# Altium PCB PCB - ancienne.PcbDoc
Units mm, origin at the board's own origin, x right, y up, seen from the top; angles counter-clockwise.
Board outline 62.87 x 92.25 mm, 2 copper layers (Top Layer, Bottom Layer); 28 components, 24 nets, 132 pads, 17 vias.
Unrouted connection lines stored in the file: 1.
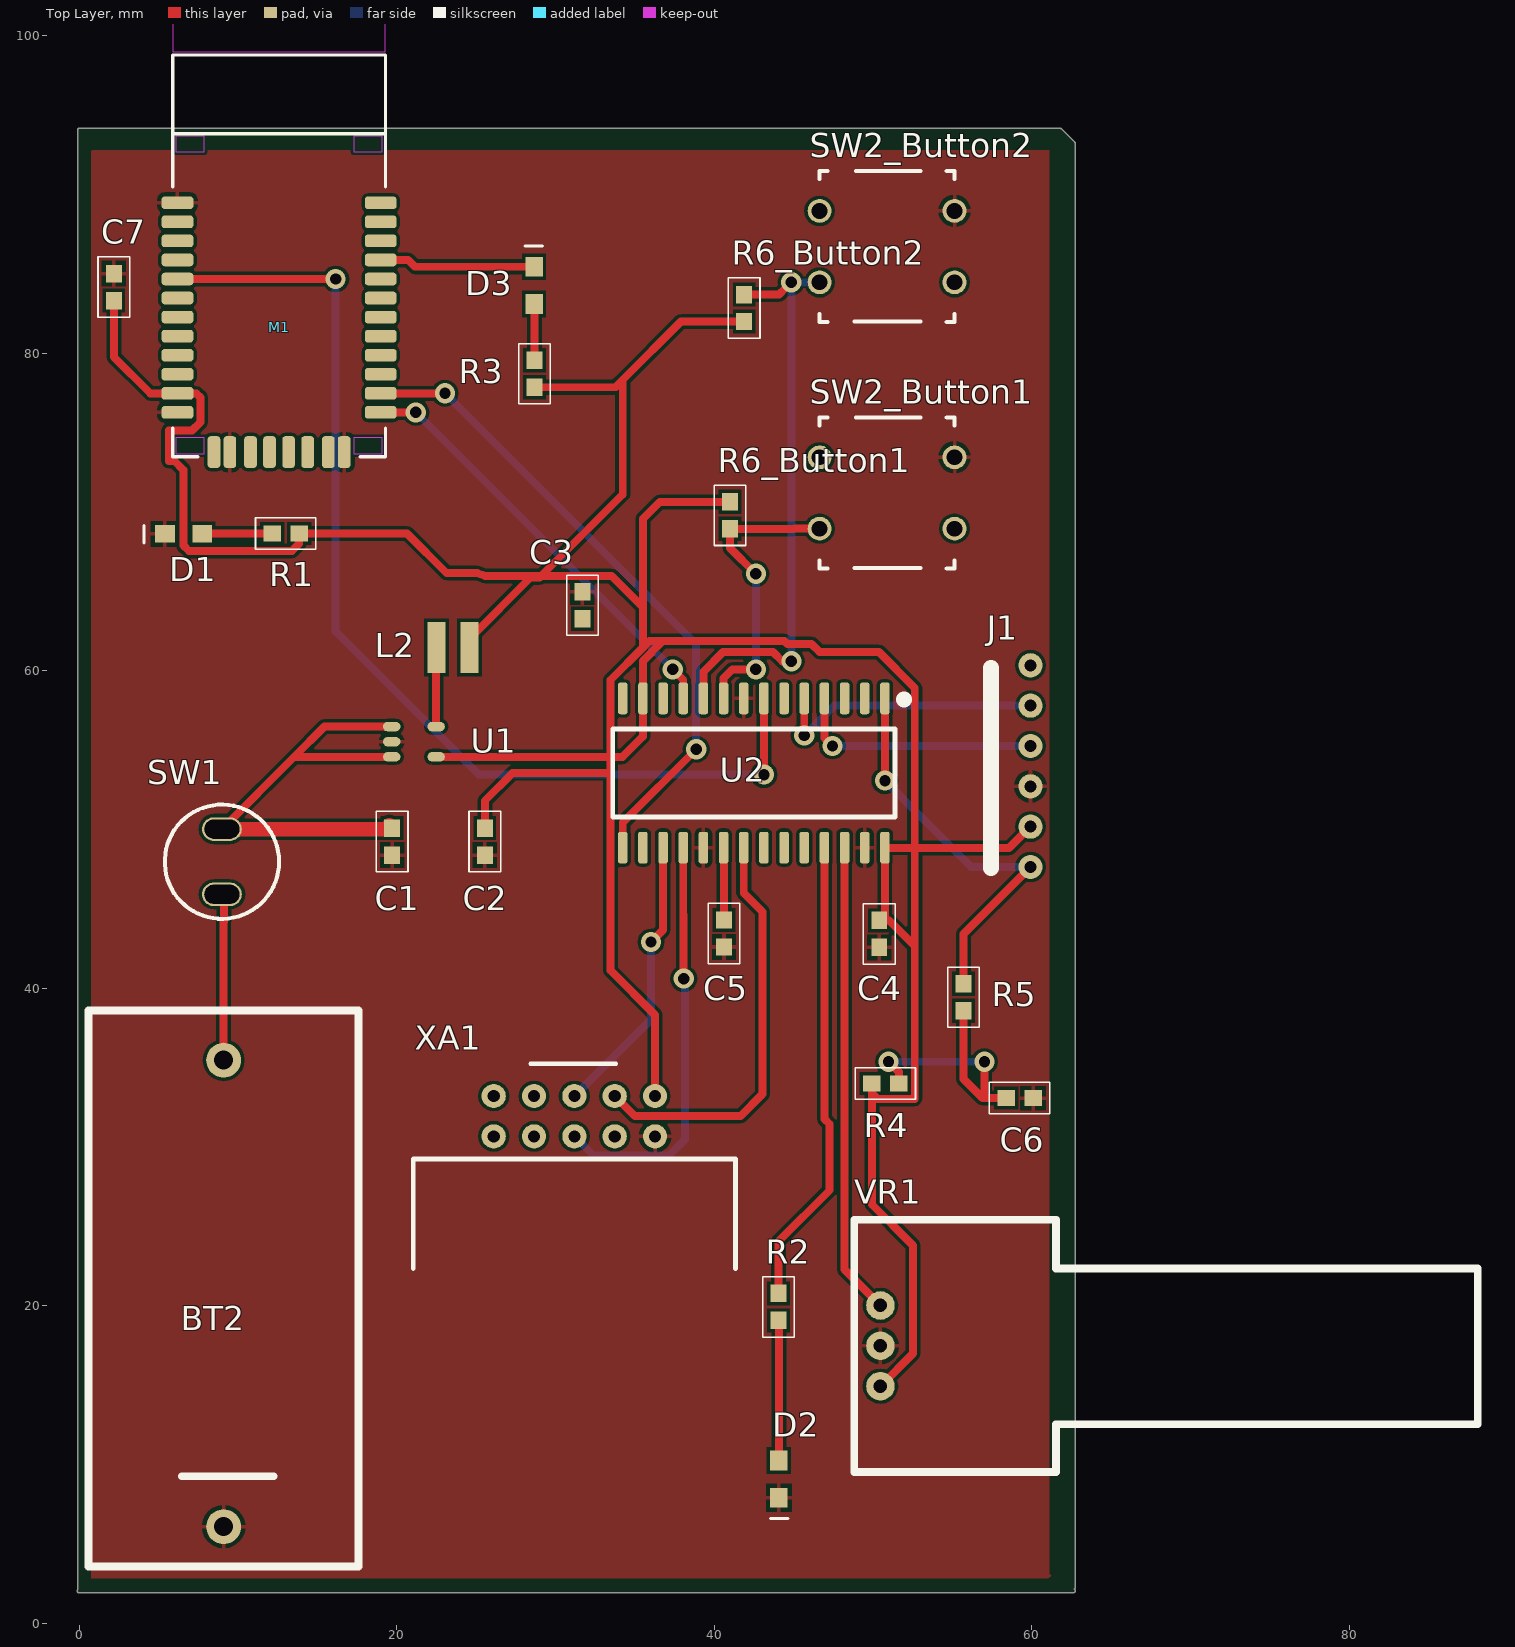
[diagram p0: Top Layer view]
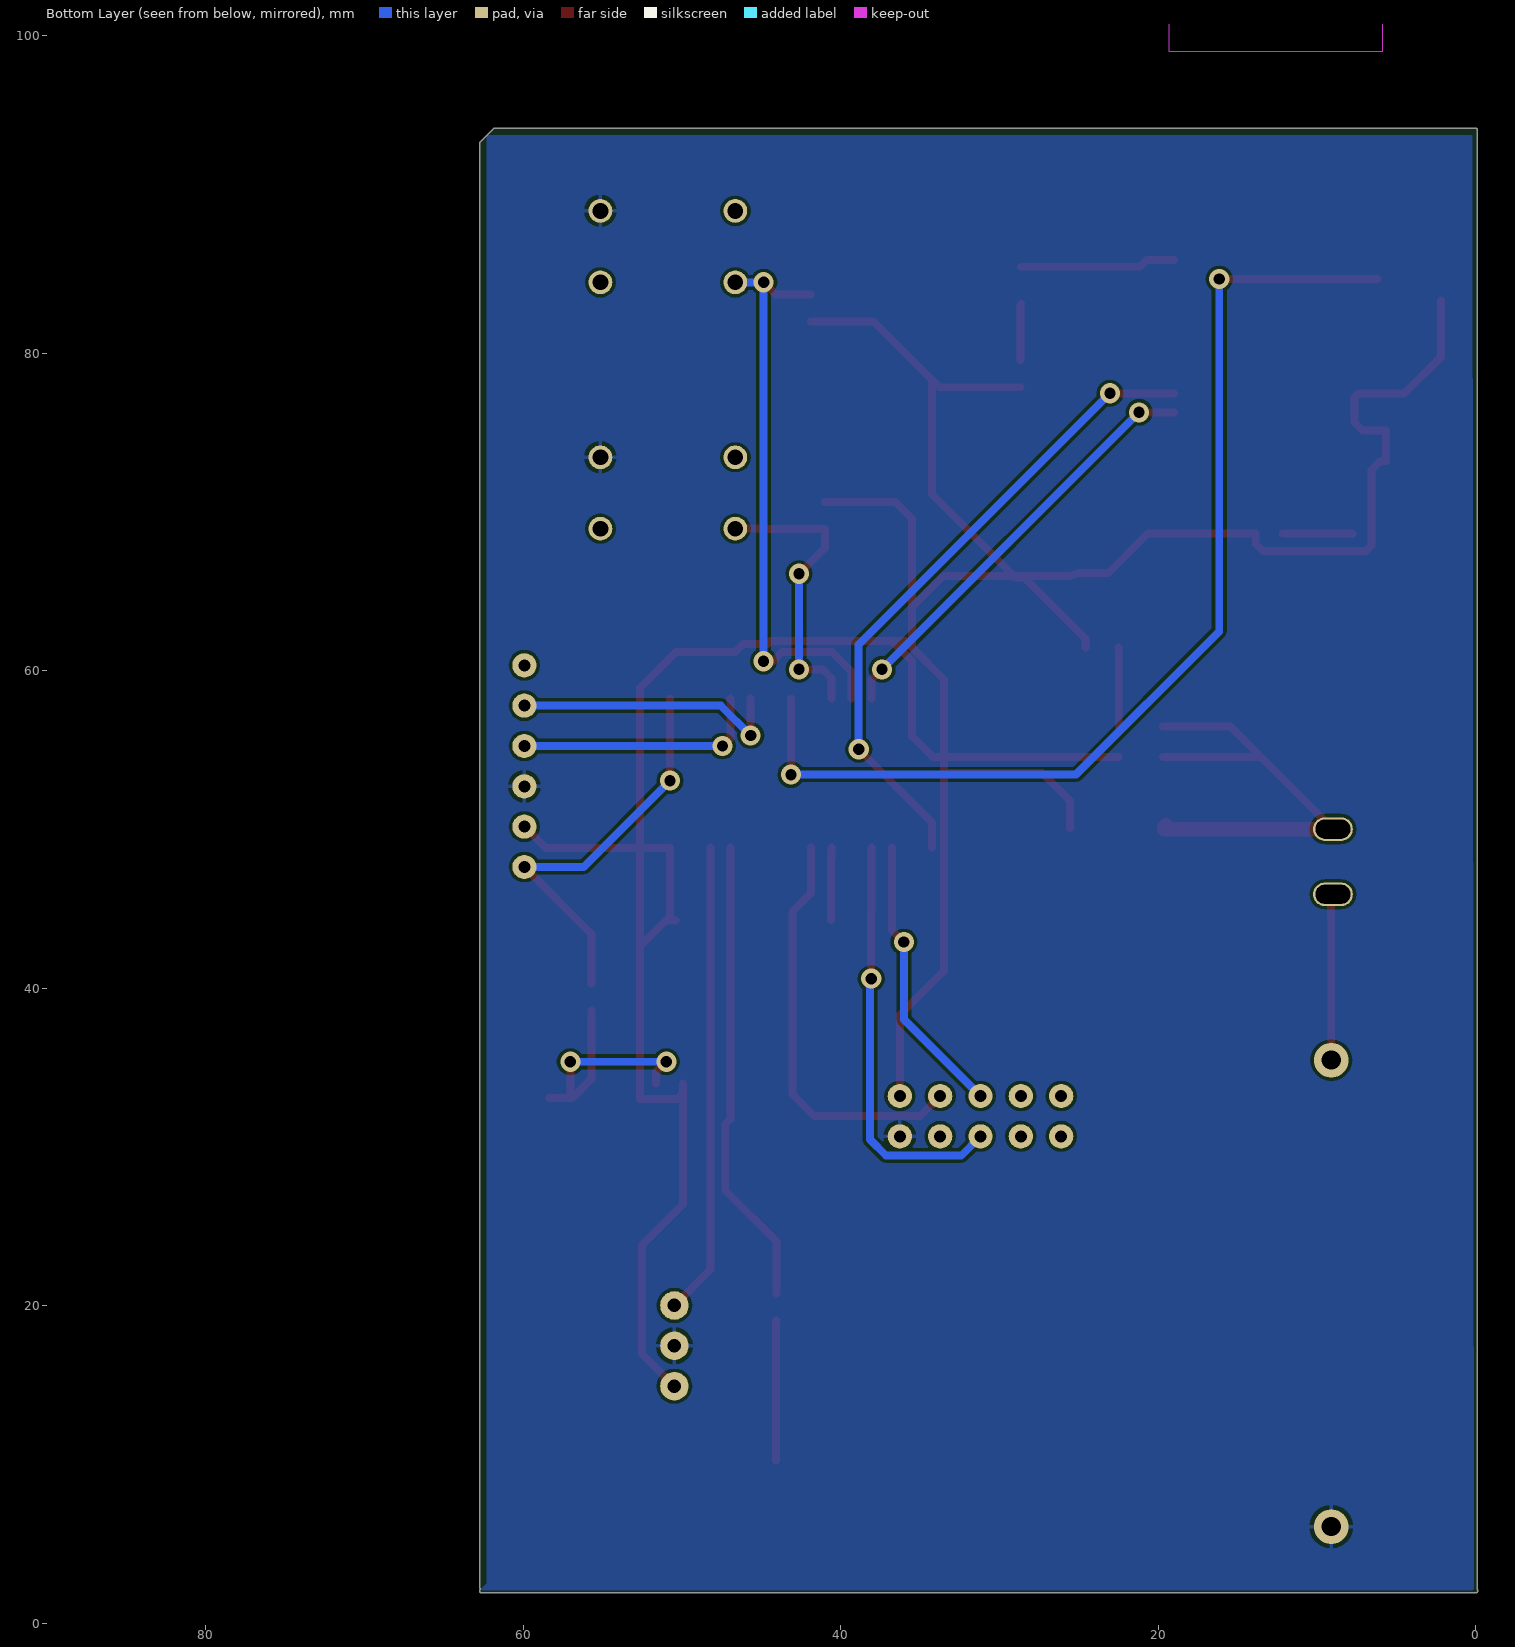
[diagram p1: Bottom Layer view, seen from below]

## Layer stack, top to bottom
Top Solder: solder mask 0.0102, Solder Resist, Dk 3.5
Top Layer: signal copper 0.0356
Dielectric 1: dielectric 0.32, FR-4, Dk 4.8
Bottom Layer: signal copper 0.0356
Bottom Solder: solder mask 0.0102, Solder Resist, Dk 3.5

## Board outline
-0.102,2.134 -0.102,94.056 cw(c0.025,94.056) 0.025,94.184 61.773,94.184 cw(c61.773,94.056) 61.863,94.146 62.701,93.308 62.701,93.309 cw(c62.611,93.218) 62.738,93.218 62.738,2.286 cw(c62.611,2.286) 62.667,2.172 cw(c62.611,2.057) 62.738,2.057 cw(c62.611,2.057) 62.611,1.93 0,1.93 cw(c0,2.057)

## Design rules (kind name [scope] priority, off if disabled: settings)
Clearance [All] p1: gap=0.2
HoleSize [All] p1: absolutevalues=TRUE maxlimit=2.54 minlimit=0.3 maxpercent=80.000 minpercent=20.000
PolygonConnect [All] p1: connectstyle=Relief reliefconductorwidth=0.254 reliefentries=4 polygonreliefangle="90 Angle" airgapwidth=0.254
RoutingVias [All] p1: holewidth=0.711 width=1.27 viastyle="Through Hole" minholewidth=0.3 minwidth=0.7 maxholewidth=0.711 maxwidth=1.27
SolderMaskExpansion [All] p1: expansion=0.102
UnpouredPolygon [All] p1: allowunpoured=FALSE
Width [All] p1: maxlimit=2 minlimit=0.3 preferedwidth=0.5
28 further rules are at their usual default settings.

## Classes and differential pairs
channel class Button: Button1 Button2
component class PIC32MX: C3 C4 C5 C6 D2 J1 R2 R4 R5 U2 VR1
component class Button2: R6_Button2 SW2_Button2
component class Button1: R6_Button1 SW2_Button1
component class Bluetooth: C7 D3 M1 R3
component class Alim: BT2 C1 C2 D1 L2 R1 SW1 U1
component class 9-axe: XA1

## Components (designator, comment, footprint, x,y, rotation, side; value= is the part's Value field where it differs from the comment)
BT2 "Battery" "Battery Holder" 9.1,6.1 r90 top
C1 "4.7 uF" "CAP 0603" 19.71,49.251 r90 top
C2 "10 uF" "CAP 0603" 25.552,49.251 r90 top
C3 "0.1uF" "CAP 0603" 31.699,64.135 r270 top
C4 "0.1uF" "CAP 0603" 50.394,43.434 r90 top
C5 "10uF" "CAP 0603" 40.615,43.459 r90 top
C6 "0.1uF" "CAP 0603" 59.233,33.096 r180 top
C7 "Cap" "CAP 0603" 2.184,84.176 r270 top
D1 "2mA, 1.8V" LED 6.579,68.631 r180 top
D2 "2mA, 1.8V" LED 44.069,9.093 r270 top
D3 "2mA, 1.8V" LED 28.651,84.277 r90 top
J1 "Program / Debug" ICSP 59.919,47.65 r90 top
L2 "4.7uH" Coil 23.546,61.468 r0 top
M1 "RN42" RN42 5.893,73.482 r0 top
R1 "750" "RES 0603" 13.005,68.656 r0 top
R2 "750" "RES 0603" 44.044,19.939 r90 top
R3 "750" "RES 0603" 28.677,78.715 r270 top
R4 "10K" "RES 0603" 50.775,34.011 r180 top
R5 "1K" "RES 0603" 55.702,39.446 r270 top
R6_Button1 "10k" "RES 0603" 40.996,69.799 r90 top (schematic designator R6)
R6_Button2 "10k" "RES 0603" 41.885,82.855 r270 top (schematic designator R6)
SW1 "SW" "Nouveau Bouton" 8.992,47.981 r90 top
SW2_Button1 "SW-SPST" SWITCH 46.634,66.954 r0 top (schematic designator SW2)
SW2_Button2 "SW-SPST" SWITCH 46.634,82.474 r0 top (schematic designator SW2)
U1 "MCP1503B" MCP1603B/TSOT 19.685,56.49 r0 top
U2 "PIC32MX150F128B" PIC32MX150F128B 50.749,58.268 r270 top
VR1 "5k" 91A1A-B28-B13L 48.819,9.55 r0 top
XA1 "MOD-MPU9150 Breakout Board" MOD-MPU9150 30.81,27.838 r270 top

## Footprints (in the part's own frame and the unit in brackets; to place one, negate y for a bottom-side part, rotate by r counter-clockwise, add the part's x,y. Pads: shape width x height; smd on the part's side, far side on the other; paste and mask are expansions set on the pad)
91A1A-B28-B13L [mm] "Potard"
  round 1.8 hole 0.85: 1(1.65,5.4) 2(1.65,7.94) 3(1.65,10.48)
  silkscreen extent 0,0 39.27,15.88
"Battery Holder" [mm]
  round 2.2 hole 1.2: 1(29.38,0) 2(0,0)
  silkscreen extent -2.5,-8.5 32.5,8.5
"CAP 0603" [mm]
  rect 1.1x1 smd: 1(-0.85,0) 2(0.85,0)
  silkscreen extent -1.9,-1 1.9,1
Coil [mm]
  rect 1.12x3.2 smd: 1(-1.04,0) 2(1.04,0)
ICSP [mil] "ICSP - 6 PINS"
  round 60 hole 30: 1(0.01,-0.02) 2(100.01,-0.02) 3(200.01,-0.02) 4(300.01,-0.02) 5(400.01,-0.02) 6(500.01,-0.02)
  silkscreen extent -3,98 494,98
LED [mm]
  rect 1.25x1.1 smd: 1(-1.175,0) 2(1.175,0)
  silkscreen extent 2.49,-0.53 2.49,0.56
MCP1603B/TSOT [mm] "TSOT Package for MCP1603 and MCP1603B buck regulator"
  oval 1.1x0.6 smd: 1(0,0) 2(0,-0.95) 3(0,-1.9) 4(2.8,-1.9) 5(2.8,0)
MOD-MPU9150 [mil] "Header for the UEXT + 1"
  round 60 hole 30: 1(-212,215) 2(-112,215) 4(-112,115) 5(-212,15) 6(-112,15) 7(-212,-85) 8(-112,-85) 9(-212,-185) 10(-112,-185) 14(-212,115)
  silkscreen extent -292,-385 216,415
"Nouveau Bouton" [mm]
  oval 1.5x2.5 hole 1.2 slot 2.2 at 90 deg: 1(-2.05,0) 2(2.05,0)
  silkscreen extent -3.6,-3.6 3.6,3.6
PIC32MX150F128B [mm] "SOIC Package"
  rrect50% 2x0.6 smd: 1(0,0) 2(0,-1.27) 3(0,-2.54) 4(0,-3.81) 5(0,-5.08) 6(0,-6.35) 7(0,-7.62) 8(0,-8.89) 9(0,-10.16) 10(0,-11.43) 11(0,-12.7) 12(0,-13.97) 13(0,-15.24) 14(0,-16.51) 15(9.4,-16.51) 16(9.4,-15.24) 17(9.4,-13.97) 18(9.4,-12.7) 19(9.4,-11.43) 20(9.4,-10.16) 21(9.4,-8.89) 22(9.4,-7.62) 23(9.4,-6.35) 24(9.4,-5.08) 25(9.4,-3.81) 26(9.4,-2.54) 27(9.4,-1.27) 28(9.4,0)
  silkscreen extent 0.05,-17.14 7.47,1.19
"RES 0603" [mm]
  rect 1.1x1 smd: 1(-0.85,0) 2(0.85,0)
  silkscreen extent -1.9,-1 1.9,1
RN42 [mm] "RN42 Bluetooth Module with antenna"
  rrect50% 2x0.8 smd: 1(0.3,16) 2(0.3,14.8) 3(0.3,13.6) 4(0.3,12.4) 5(0.3,11.2) 6(0.3,10) 7(0.3,8.8) 8(0.3,7.6) 9(0.3,6.4) 10(0.3,5.2) 11(0.3,4) 12(0.3,2.8) 13(13.1,2.8) 14(13.1,4) 15(13.1,5.2) 16(13.1,6.4) 17(13.1,7.6) 18(13.1,8.8) 19(13.1,10) 20(13.1,11.2) 21(13.1,12.4) 22(13.1,13.6) 23(13.1,14.8) 24(13.1,16)
  rrect50% 0.8x2 smd mask+0.05: 28(10.8,0.3) 29(3.6,0.3) 30(9.8,0.3) 35(2.6,0.3)
  rrect50% 0.8x2 smd: 31(8.5,0.3) 32(7.3,0.3) 33(6.1,0.3) 34(4.9,0.3)
  Top Layer keep-out region: 0.2,0.2 2,0.2 2,1.2 0.2,1.2
  Top Layer keep-out region: 11.4,19.2 13.2,19.2 13.2,20.2 11.4,20.2
  Top Layer keep-out region: 0.2,19.2 2,19.2 2,20.2 0.2,20.2
  Top Layer keep-out region: 11.4,0.2 13.2,0.2 13.2,1.2 11.4,1.2
  Multi-Layer keep-out region: 0,25.5 13.4,25.5 13.4,54.3 0,54.3
  silkscreen extent 0,0 13.4,25.3
SWITCH [mm]
  round 1.5 hole 1: 1(0,2) 2(8.5,6.5) 3(0,6.5) 4(8.5,2)
  silkscreen extent 0,-0.49 8.51,9

## Part data
BT2: "Multicell Battery"
C1 C2 C3 C4 C5 C6: library part Cap, "Capacitor"
C7: "Capacitor"
D1 D2 D3: library part LED0, "Typical INFRARED GaAs LED"
J1: library part MHDR1X6, "Header, 6-Pin"
L2: library part Inductor, "Inductor"
M1: "RN42 Bluetooth Module by Roven Networks"
R1 R2 R3 R4 R5 R6_Button1 R6_Button2: library part Res1, "Resistor"
SW1: library part SW-SPST, "Single-Pole, Single-Throw Switch"
SW2_Button1 SW2_Button2: "Single-Pole, Single-Throw Switch"
U1: library part MCP1603B, "Fixed 3.3Vout 0.5Aout regulator"
U2: library part PIC32MX130F256B, "PIC32MX Family Microcontroller"
VR1: library part RPot, "Potentiometer"
XA1: library part MPU9150, "MPU9150 Breakout Board, displaying 3 headers"

## Via types
v1: diameter 1.27, hole 0.711, Top Layer to Bottom Layer, 17 vias

## Nets (pads, with @x,y where several pads share a name; then routed paths per layer and width w, separated by ;. In a path a pad name is that pad's centre, name@x,y a point inside that pad or via, vN(x,y) a via of type N, cw(c..) or ccw(c..) an arc to the next point about the centre after c; other vN are vias at no path point)
"BOUTTON 1": R6_Button1.1 SW2_Button1.1 U2.9 | length 18.7
  Top Layer w0.5: U2.9 40.589,59.538 41.148,60.096 v1(42.621,60.096) ; v1(42.621,66.116) 40.996,67.742 R6_Button1.1 45.034,68.949 45.039,68.954 SW2_Button1.1
  Bottom Layer w0.5: v1(42.621,60.096) v1(42.621,66.116)
"BOUTTON 2": R6_Button2.1 SW2_Button2.1 U2.10 | length 36.9
  Top Layer w0.5: U2.10 39.319,59.944 40.557,61.181 43.706,61.181 44.283,60.604 v1(44.856,60.604) ; R6_Button2.1 44.081,83.705 44.469,84.093 v1(44.85,84.474)
  Bottom Layer w0.5: v1(44.85,84.474) v1@44.856,84.474 ; v1(44.856,60.604) v1@44.856,84.474 ; SW2_Button2.1 v1@44.856,84.474
GND: BT2.2 C1.1 C2.1 C3.1 C4.1 C5.1 C6.1 C7.1 D1.2 D2.2 J1.3 M1.1 M1.12 M1.28 M1.29 SW2_Button1.2 SW2_Button2.2 U1.2 U2.8 U2.19 U2.27 VR1.2 XA1.2
MCLR: J1.1 R5.1 U2.1 | length 25.7
  Top Layer w0.5: v1(50.749,53.086) U2.1 ; R5.1 55.702,43.434 J1.1
  Bottom Layer w0.5: v1(50.749,53.086) 56.185,47.651 J1.1
NetBT2_1: BT2.1 SW1.1 | length 10.6
  Top Layer w0.5: SW1.1 9.119,45.931 9.119,44.215 9.1,44.196 BT2.1
NetC1_2: C1.2 SW1.2 U1.1 U1.3 | length 30.7
  Top Layer w0.5: SW1.2 13.551,54.59 ; C1.2@19.526,50.285 C1.2 ; U1.3 13.551,54.59 ; U1.1 15.451,56.49 13.551,54.59
  Top Layer w0.9: SW1.2 19.64,50.031 19.626,50.063 C1.2@19.526,50.285
NetC5_2: C5.2 U2.20 | length 4.6
  Top Layer w0.5: U2.20 40.589,48.158 40.615,48.133 C5.2
NetC6_2: C6.2 R4.1 R5.2 | length 17.5
  Top Layer w0.5: v1(50.978,35.382) 51.625,34.735 R4.1 ; R5.2 55.702,34.29 56.896,33.096 57.023,33.096 ; v1(57.023,35.382) 57.023,33.096 ; C6.2 57.023,33.096
  Bottom Layer w0.5: v1(50.978,35.382) v1(57.023,35.382)
NetD1_1: D1.1 R1.1 | length 4.4
  Top Layer w0.5: D1.1 7.779,68.656 R1.1
NetD2_1: D2.1 R2.1 | length 8.8
  Top Layer w0.5: R2.1 44.069,19.089 D2.1
NetD3_1: D3.1 R3.1 | length 3.6
  Top Layer w0.5: D3.1 28.651,83.033 28.677,83.033 R3.1
NetD3_2: D3.2 M1.21 | length 9.8
  Top Layer w0.5: M1.21 20.722,85.882 21.152,85.452 D3.2
NetL2_1: L2.1 U1.5 | length 5
  Top Layer w0.5: U1.5 22.485,61.447 L2.1
NetM1_5: M1.5 U2.7 | length 67.7
  Top Layer w0.5: M1.5 v1(16.154,84.682) ; v1(43.129,53.467) U2.7
  Bottom Layer w0.5: v1(16.154,84.682) 16.154,62.484 25.171,53.467 v1(43.129,53.467)
NetM1_13: M1.13 U2.11 | length 27.2
  Top Layer w0.5: M1.13 v1(21.203,76.282) ; v1(37.389,60.096) 38.049,59.436 U2.11
  Bottom Layer w0.5: v1(21.203,76.282) v1(37.389,60.096)
NetM1_14: M1.14 U2.15 | length 41.1
  Top Layer w0.5: M1.14 v1(23.038,77.482) ; U2.15 34.239,50.444 v1(38.862,55.067)
  Bottom Layer w0.5: v1(23.038,77.482) 38.862,61.658 v1(38.862,55.067)
NetR2_2: R2.2 U2.25 | length 29.6
  Top Layer w0.5: R2.2 44.044,24.07 47.268,27.295 47.268,31.448 46.939,31.778 U2.25
NetU2_17: U2.17 XA1.5 | length 18
  Top Layer w0.5: v1(36.017,42.926) 36.779,43.688 U2.17
  Bottom Layer w0.5: XA1.5 36.017,38.049 v1(36.017,42.926)
NetU2_18: U2.18 XA1.6 | length 26.4
  Top Layer w0.5: U2.18 v1(38.075,40.615)
  Bottom Layer w0.5: XA1.6 32.41,29.464 37.135,29.464 38.151,30.48 38.151,40.513 38.049,40.615 v1@38.049,40.691
NetU2_21: U2.21 XA1.14 | length 26.4
  Top Layer w0.5: XA1.14 35.001,31.953 41.656,31.953 43.046,33.343 43.046,44.823 41.859,46.009 U2.21
NetU2_26: U2.26 VR1.3 | length 29.8
  Top Layer w0.5: U2.26 48.209,22.29 VR1.3
PGEC: J1.5 U2.5 | length 17.4
  Top Layer w0.5: v1(45.669,55.931) U2.5
  Bottom Layer w0.5: v1(45.669,55.931) 47.549,57.811 J1.5
PGED: J1.4 U2.4 | length 15.7
  Top Layer w0.5: U2.4 46.939,55.779 v1(47.447,55.271)
  Bottom Layer w0.5: v1(47.447,55.271) J1.4
V3P3: C2.2 C3.2 C4.2 C7.2 J1.2 L2.2 M1.11 R1.2 R3.2 R4.2 R6_Button1.2 R6_Button2.2 U1.4 U2.13 U2.28 VR1.1 XA1.1 | length 249.8
  Top Layer w0.5: C7.2 2.184,79.776 4.479,77.482 M1.11 7.379,77.482 7.645,77.216 7.645,75.667 7.112,75.133 5.643,75.133 5.643,73.228 5.994,73.228 6.579,72.644 6.579,67.894 6.909,67.564 13.411,67.564 13.855,68.008 R1.2 20.65,68.656 23.152,66.154 23.793,66.154 25.075,66.154 25.551,65.989 29.107,65.989 ; U1.4 33.477,54.59 ; L2.2 24.586,62.029 28.448,65.891 29.009,65.891 29.107,65.989 ; C2.2 25.552,51.816 27.305,53.569 33.477,53.569 ; R3.2 33.77,77.865 34.239,78.334 ; XA1.1 36.271,38.329 33.477,41.123 33.477,53.569 ; R6_Button1.2 36.576,70.649 35.509,69.582 35.509,64.008 ; R6_Button2.2 37.91,82.005 34.239,78.334 ; R4.2 49.925,33.413 ; C4.2 C4.2@50.749,44.284 ; VR1.1 52.525,17.007 52.525,23.802 49.925,26.402 49.925,33.413 ; U2.28 U2.28@50.749,48.844 ; J1.2 58.573,48.844 52.629,48.844 ; 29.107,65.989 33.528,65.989 35.509,64.008 ; 29.107,65.989 34.239,71.121 34.239,78.334 ; 33.477,53.569 33.477,54.59 ; 33.477,54.59 33.477,59.436 35.509,61.468 ; 33.477,54.59 34.219,54.59 35.509,55.88 U2.13 35.509,60.629 36.762,61.881 ; 35.509,61.468 35.923,61.881 36.762,61.881 ; 35.509,61.468 35.509,64.008 ; 36.762,61.881 44.413,61.881 44.605,61.689 46.133,61.689 46.641,61.181 50.375,61.181 52.629,58.928 52.629,48.844 ; 49.925,33.413 50.292,33.045 52.629,33.045 52.629,42.672 ; C4.2@50.749,44.284 51.017,44.284 52.629,42.672 ; C4.2@50.749,44.284 U2.28@50.749,48.844 ; U2.28@50.749,48.844 52.629,48.844 ; 52.629,42.672 52.629,48.844
pads on no net: J1.6 M1.2 M1.3 M1.4 M1.6 M1.7 M1.8 M1.9 M1.10 M1.15 M1.16 M1.17 M1.18 M1.19 M1.20 M1.22 M1.23 M1.24 M1.30 M1.31 M1.32 M1.33 M1.34 M1.35 SW2_Button1.3 SW2_Button1.4 SW2_Button2.3 SW2_Button2.4 U2.2 U2.3 U2.6 U2.12 U2.14 U2.16 U2.22 U2.23 U2.24 XA1.4 XA1.7 XA1.8 XA1.9 XA1.10

## Polygon pours and split planes (outlines as drawn)
GND on Top Layer "Top Layer-No Net" (solid, pour order 2): 0.762,92.888 0.864,92.786 61.112,92.786 61.112,3.124 61.214,3.023 61.036,2.845 0.762,2.845
GND on Bottom Layer "B Layer-No Net" (solid, pour order 4): 0.229,93.777 0.275,93.731 62.286,93.731 62.286,2.549 62.729,2.106 62.727,2.108 0.127,2.108

## Silkscreen, mask and mechanical layers (free items; w line width, h text height)
Mechanical 1:
  lines w0.254: 0,2.057 62.611,2.057 62.611,2.286 62.611,3.531 62.611,93.218 61.773,94.056 0.025,94.056 0.025,2.083